# EAGLE board pcb v46 (EAGLE 9.7.0)
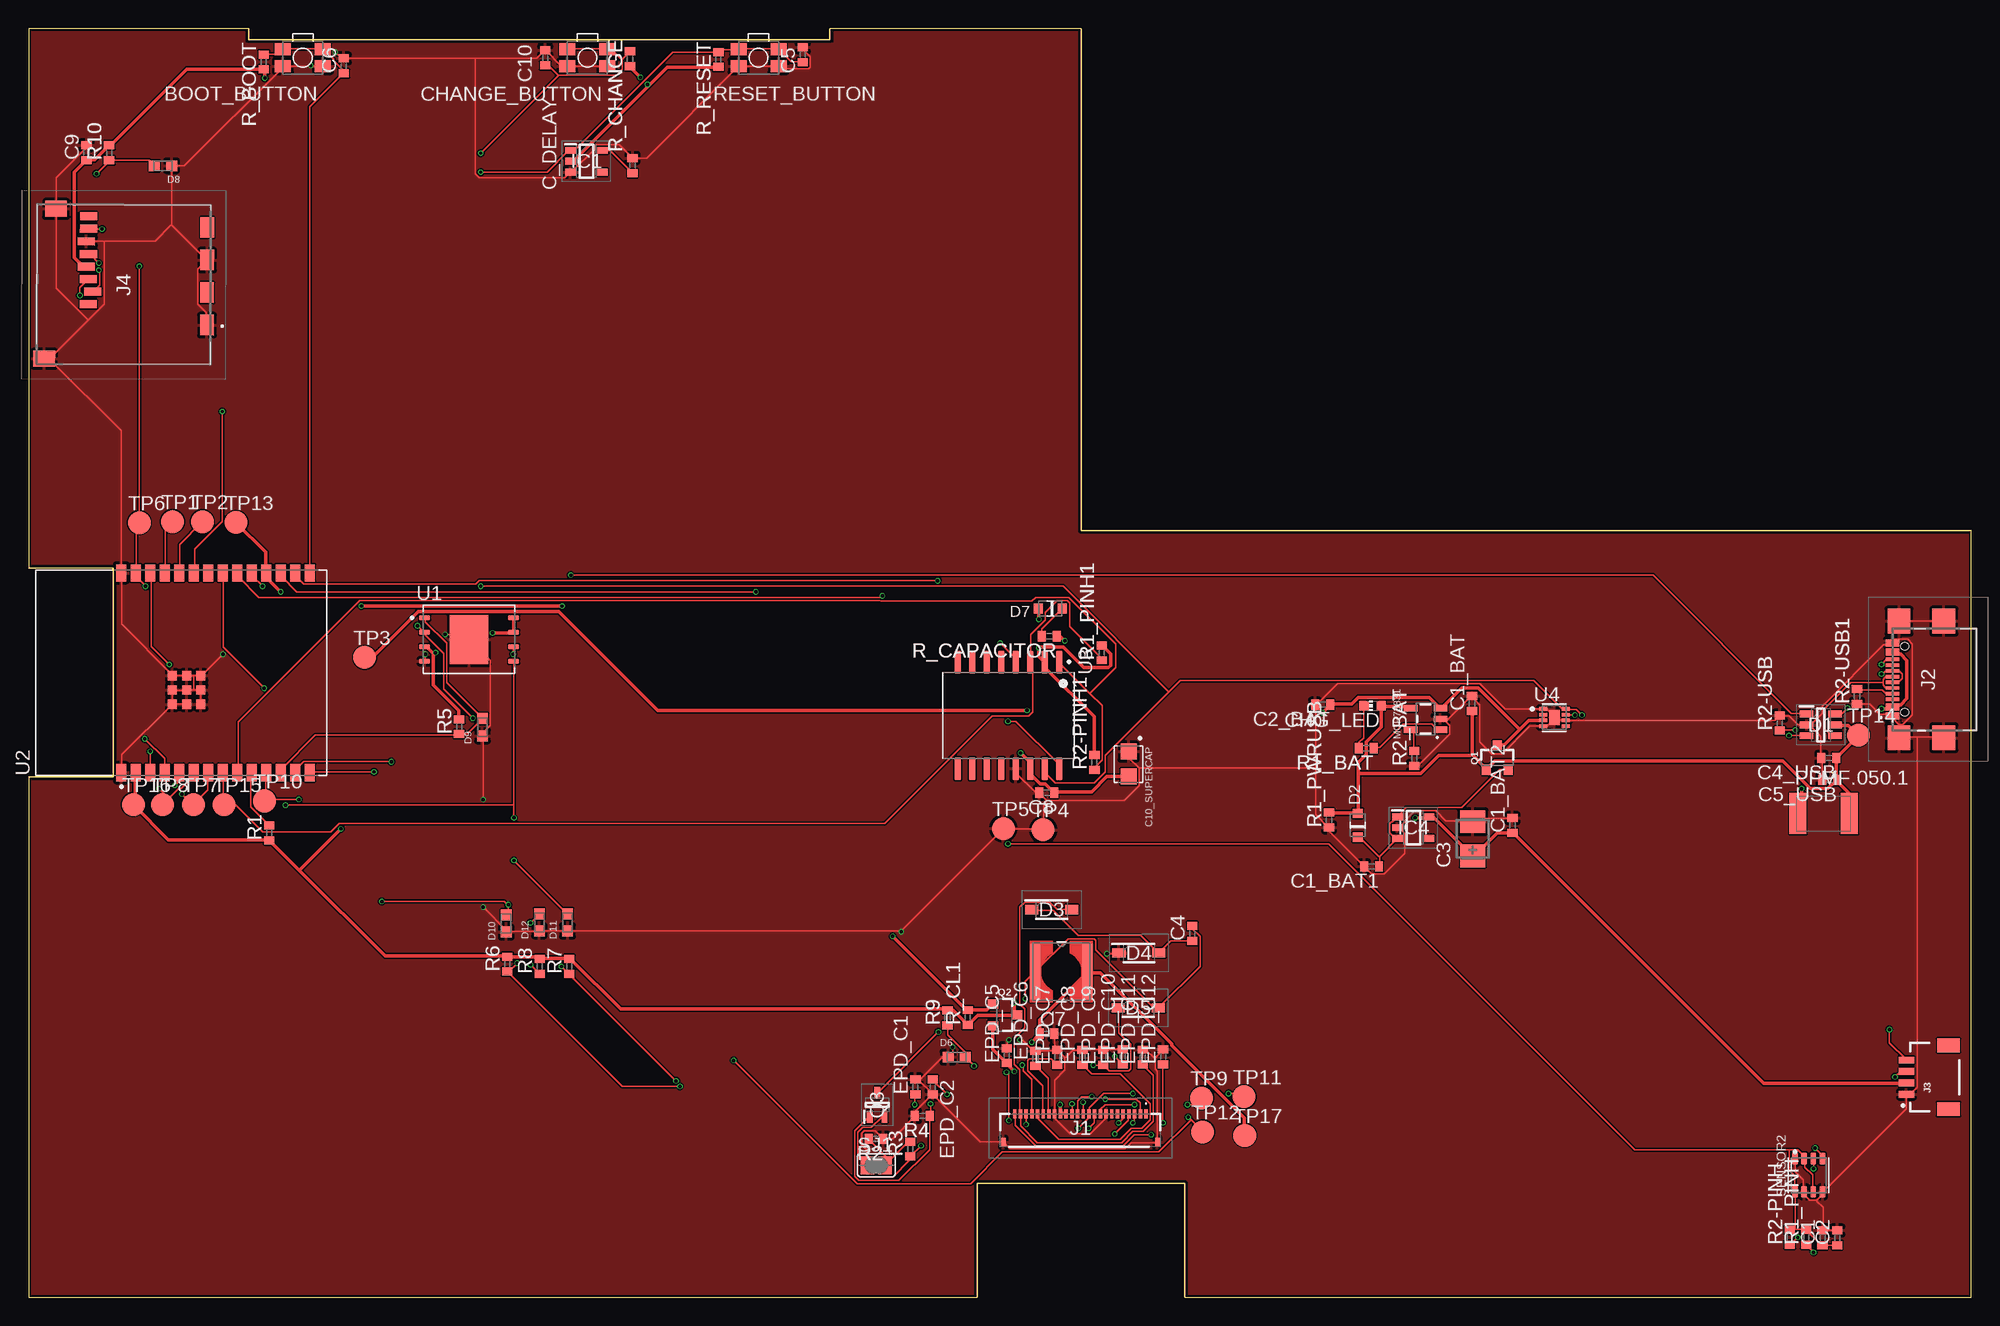
[diagram p0: board, top side]
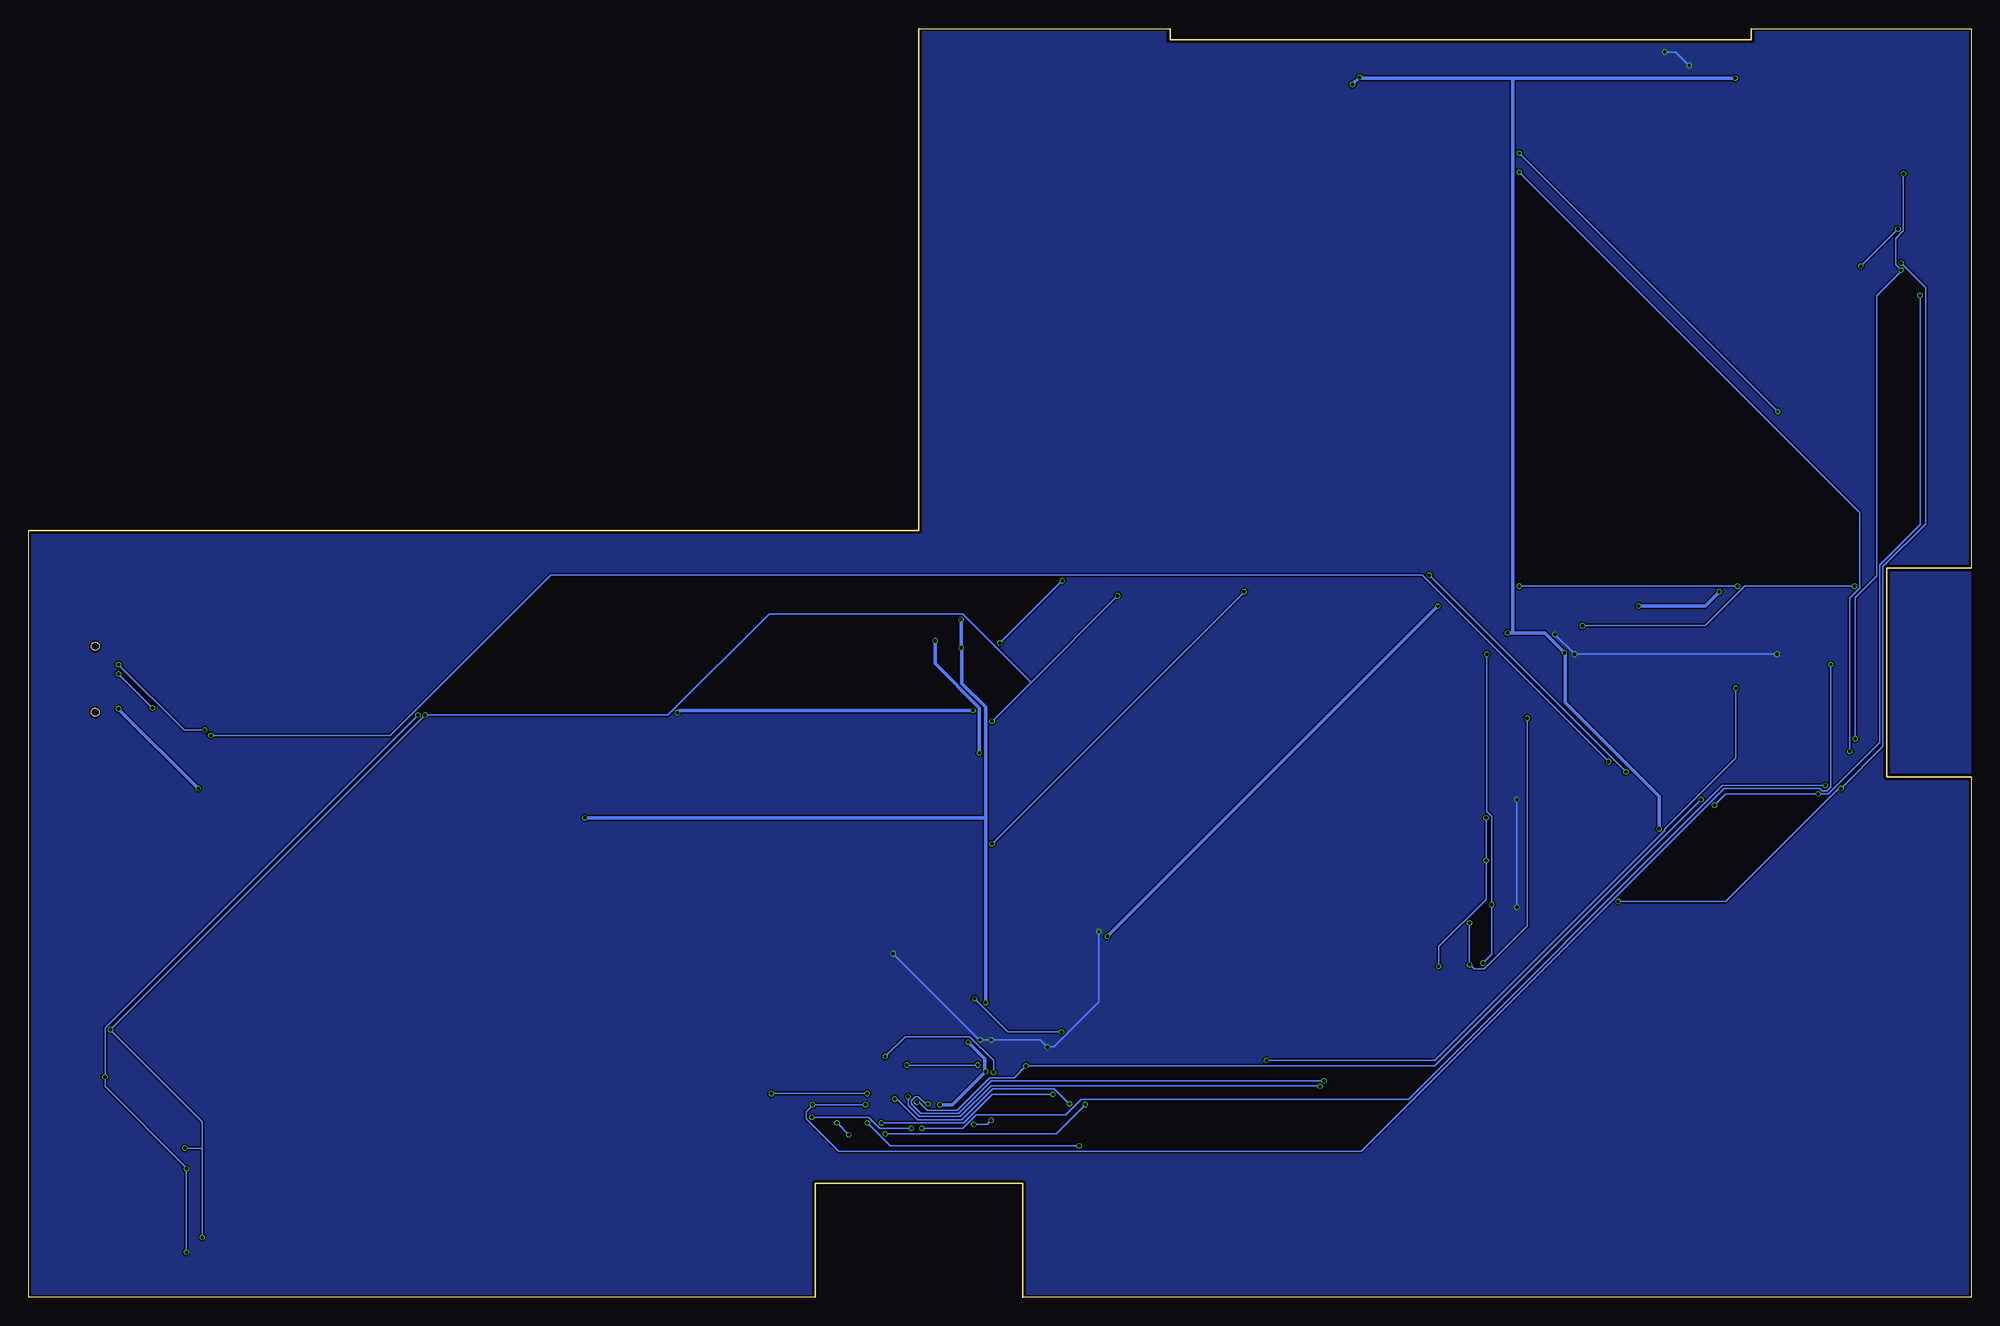
[diagram p1: board, bottom side, seen from below]

Size 170.2 x 111.2 mm. Coordinates in mm from the lower left corner, seen from the top.
Outline: 0,0 83.1,0 83.1,10 101.3,10 101.3,0 170.2,0 170.2,67.2 92.2,67.2 92.2,111.2 70.2,111.2 70.2,110.2 19.3,110.2 19.3,111.2 0,111.2 0,63.9 7.4,63.9 7.4,45.6 0,45.6 0,0
Copper layers (1*16): Top 0.035mm / dielectric 1.6mm / Bottom 0.035mm
Design rules "jlcpcb-2layers.dru *": minimum track width 5mil, minimum drill 0.3mm, track to track 5mil, track to pad 5mil, pad to pad 5mil, via to via 5mil, smd to smd 5mil, copper to edge 0.2mm, drill to drill 6mil, minimum pad ring 10mil, minimum via ring 3mil, stop-mask expansion 4mil, vias tented up to drill 0mil, thermal gap 10mil
Net classes: 0 default: width 0.15 mm; 1 POWER: width 0.3 mm

## Footprints (pad centres in the part's own frame; a part is rotated, then mirrored left to right if it is on the bottom)
MYBUTTON = smd 1.4 x 1.05: 1 1.75,0.75; 2 -1.75,0.75; 3 -1.75,-0.75; 4 1.75,-0.75
ESP32_WROVER_EAGLE-LTSPICE_C0402 = smd 0.7 x 0.9: 1 -0.65,0; 2 0.65,0
RCL_CT3528 = smd 2 x 2.2: + -1.5,0; - 1.5,0
CAPCP3225X100N = smd 1.4 x 1.4: 1 -1.1,0; 2 1.1,0
ADAFRUIT_CHIP-LED0603 = smd 0.8 x 0.8: A 0,-0.75; C 0,0.75
SOT95P280X145-6N = smd 1.2 x 0.6: 1 -1.25,0.95; 2 -1.25,0; 3 -1.25,-0.95; 4 1.25,-0.95; 5 1.25,0; 6 1.25,0.95
ESP32_WROVER_AVX---SD0805S020S1R0_AVX_SD0805S020S1R0_0 = smd 0.8 x 0.9: 1 -1.05,0; 2 1.05,0
SOD3716X135N = smd 1.15 x 0.8: 1 -1.75,0; 2 1.75,0
DIOC1608X36N = smd 0.97 x 0.94: 1 -0.75,0; 2 0.75,0
SOT95P280X125-5N = smd 0.9 x 0.6: 1 -1.4,0.95; 2 -1.4,0; 3 -1.4,-0.95; 4 1.4,-0.95; 5 1.4,0.95
SOT95P280X120-5N = smd 0.9 x 0.6: 1 -1.4,0.95; 2 -1.4,0; 3 -1.4,-0.95; 4 1.4,-0.95; 5 1.4,0.95
FH34SRJ24S05SH99 = smd 0.3 x 0.8: 1 5.75,1.45; 2 5.25,1.45; 3 4.75,1.45; 4 4.25,1.45; 5 3.75,1.45; 6 3.25,1.45; 7 2.75,1.45; 8 2.25,1.45; 9 1.75,1.45; 10 1.25,1.45; 11 0.75,1.45; 12 0.25,1.45; 13 -0.25,1.45; 14 -0.75,1.45; 15 -1.25,1.45; 16 -1.75,1.45; 17 -2.25,1.45; 18 -2.75,1.45; 19 -3.25,1.45; 20 -3.75,1.45; 21 -4.25,1.45; 22 -4.75,1.45; 23 -5.25,1.45; 24 -5.75,1.45 | smd 0.4 x 0.8: MP1 6.75,-1.05; MP2 -6.75,-1.05
SAMACSYS_PARTS_USB4110GFA = smd 0.3 x 1.15: A1 -3.35,3.678; A4 -2.55,3.678; A5 -1.25,3.678; A6 -0.25,3.678; A7 0.25,3.678; A8 1.25,3.678; A9 2.55,3.678; A12 3.35,3.678; B1 3.05,3.678; B4 2.25,3.678; B5 1.75,3.678; B6 0.75,3.678; B7 -0.75,3.678; B8 -1.75,3.678; B9 -2.25,3.678; B12 -3.05,3.678 | smd 2.18 x 2: MP1 -5.11,-0.827; MP2 5.11,-0.827; MP3 -5.11,3.103; MP4 5.11,3.103 | hole 0.65: -2.89,2.603; 2.89,2.603
JST04_1MM_RA = smd 0.6 x 1.35: 1 -1.5,0; 2 -0.5,0; 3 0.5,0; 4 1.5,0 | smd 1.2 x 2: NC1 2.8,-3.675; NC2 -2.8,-3.675
112ATAARR03ATTEND = smd 1.8 x 1.2: G1 10.6,10.4; G2 4.9,10.4; S1 7.75,10.4; S2 2.05,10.4 | smd 1.4 x 1.9: G3 13.6,-3.85; G4 0.45,-2.85 | smd 0.7 x 1.5: P1 8.8,0; P2 7.7,0.4; P3 6.6,0; P4 5.5,-0.2; P5 4.4,0; P6 3.3,-0.2; P7 2.2,0; P8 1.1,0
IND_4828-WE-TPC_WRE = smd 0.889 x 4.826: 1 -2.286,0; 2 2.286,0
ESP32_WROVER_SPARKFUN-IC-POWER_SOT23-5 = smd 0.55 x 1.2: 1 -0.95,-1.3; 2 0,-1.3; 3 0.95,-1.3; 4 0.95,1.3; 5 -0.95,1.3
ESP32C6_VARISTOR_CT/CN1812 = smd 1.5 x 3.6: 1 -2.25,0; 2 2.25,0
ESP32_WROVER_SPARKFUN-DISCRETESEMI_SOT23-3 = smd 0.8 x 0.9: 1 -0.95,-1; 2 0.95,-1; 3 0,1.1
SOT65P210X110-3N = smd 1.05 x 0.5: 1 -1.05,0.65; 2 -1.05,-0.65; 3 1.05,0
ESP32_WROVER_EAGLE-LTSPICE_R0402 = smd 0.7 x 0.9: 1 -0.65,0; 2 0.65,0
ESP32_WROVER_BME680_PSON80P300X300X100-8N = smd 1.016 x 0.5: 1 1.458,1.2; 2 1.458,0.4; 3 1.458,-0.4; 4 1.458,-1.2; 5 -1.458,-1.22; 6 -1.458,-0.4; 7 -1.458,0.4; 8 -1.458,1.2
SJ = smd 1.168 x 1.6: 1 -0.762,0; 2 0.762,0
TP20R = smd 2 x 2: TP 0,0
SON127P600X800X80-9N = smd 0.94 x 0.44: 1 -3.895,1.905; 2 -3.895,0.635; 3 -3.895,-0.635; 4 -3.895,-1.905; 5 3.895,-1.905; 6 3.895,-0.635; 7 3.895,0.635; 8 3.895,1.905 | smd 3.4 x 4.3: 9 0,0
XCVR_ESP32-C6-WROOM-1-N8 = smd 1.5 x 0.9: 1 -8.75,5.26; 2 -8.75,3.99; 3 -8.75,2.72; 4 -8.75,1.45; 5 -8.75,0.18; 6 -8.75,-1.09; 7 -8.75,-2.36; 8 -8.75,-3.63; 9 -8.75,-4.9; 10 -8.75,-6.17; 11 -8.75,-7.44; 12 -8.75,-8.71; 13 -8.75,-9.98; 14 -8.75,-11.25; 15 8.75,-11.25; 16 8.75,-9.98; 17 8.75,-8.71; 18 8.75,-7.44; 19 8.75,-6.17; 20 8.75,-4.9; 21 8.75,-3.63; 22 8.75,-2.36; 23 8.75,-1.09; 24 8.75,0.18; 25 8.75,1.45; 26 8.75,2.72; 27 8.75,3.99; 28 8.75,5.26 | smd 0.8 x 0.8: 29_1 -2.755,0.79; 29_2 -1.505,0.79; 29_3 -0.255,0.79; 29_4 -2.755,-0.46; 29_5 -1.505,-0.46; 29_6 -0.255,-0.46; 29_7 -2.755,-1.71; 29_8 -1.505,-1.71; 29_9 -0.255,-1.71
SOIC127P1032X265-16N = smd 2.05 x 0.59: 1 -4.655,4.445; 2 -4.655,3.175; 3 -4.655,1.905; 4 -4.655,0.635; 5 -4.655,-0.635; 6 -4.655,-1.905; 7 -4.655,-3.175; 8 -4.655,-4.445; 9 4.655,-4.445; 10 4.655,-3.175; 11 4.655,-1.905; 12 4.655,-0.635; 13 4.655,0.635; 14 4.655,1.905; 15 4.655,3.175; 16 4.655,4.445
SON50P200X200X80-9N = smd 0.76 x 0.3: 1 -0.985,0.75; 2 -0.985,0.25; 3 -0.985,-0.25; 4 -0.985,-0.75; 5 0.985,-0.75; 6 0.985,-0.25; 7 0.985,0.25; 8 0.985,0.75 | smd 0.9 x 1.3: 9 0,0

## Placement (x,y rotation side)
BOOT_BUTTON  BUTTON_CUSYOMV1  [MYBUTTON]  24.03,108.65 180 top
C1  100nF  [ESP32_WROVER_EAGLE-LTSPICE_C0402]  157.16,5.23 90 top
C1_BAT  4.7uF  [ESP32_WROVER_EAGLE-LTSPICE_C0402]  126.45,52.05 90 top
C1_BAT1  4.7uF  [ESP32_WROVER_EAGLE-LTSPICE_C0402]  117.65,37.77 180 top
C1_BAT2  4.7uF  [ESP32_WROVER_EAGLE-LTSPICE_C0402]  129.99,41.37 90 top
C2  100nF  [ESP32_WROVER_EAGLE-LTSPICE_C0402]  158.44,5.23 90 top
C2_BAT  4.7uF  [ESP32_WROVER_EAGLE-LTSPICE_C0402]  113.36,51.95 180 top
C3  100uF TANT  [RCL_CT3528]  126.51,40.2 90 top
C4  4.7uF/25V  [ESP32_WROVER_EAGLE-LTSPICE_C0402]  101.95,31.89 90 top
C4_USB  100nF  [ESP32_WROVER_EAGLE-LTSPICE_C0402]  157.7,47.27 180 top
C5  1uF  [ESP32_WROVER_EAGLE-LTSPICE_C0402]  67.82,108.91 90 top
C5_USB  4.7uF  [ESP32_WROVER_EAGLE-LTSPICE_C0402]  157.78,45.35 180 top
C6  100nF  [ESP32_WROVER_EAGLE-LTSPICE_C0402]  27.62,107.93 90 top
C7  10uF  [ESP32_WROVER_EAGLE-LTSPICE_C0402]  89.22,23.11 0 top
C8  100nF  [ESP32_WROVER_EAGLE-LTSPICE_C0402]  89.2,44.23 180 top
C9  100nF  [ESP32_WROVER_EAGLE-LTSPICE_C0402]  5.08,100.33 90 top
C10  100nF  [ESP32_WROVER_EAGLE-LTSPICE_C0402]  45.26,108.63 90 top
C10_SUPERCAP  CPH3225A  [CAPCP3225X100N]  96.36,46.74 270 top
C_DELAY  100nF  [ESP32_WROVER_EAGLE-LTSPICE_C0402]  52.91,99.19 90 top
CHANGE_BUTTON  BUTTON_CUSYOMV1  [MYBUTTON]  48.96,108.63 180 top
CHG_LED  [ADAFRUIT_CHIP-LED0603]  117.74,51.85 90 top
D1  USBLC6-2SC6Y  [SOT95P280X145-6N]  157,50.17 0 top
D2  ESP32_WROVER_AVX---SD0805S020S1R0_AVX_SD0805S020S1R0_0_0AVX_SD0805S020S1R0_0_0  [ESP32_WROVER_AVX---SD0805S020S1R0_AVX_SD0805S020S1R0_0]  116.44,41.38 90 top
D3  MBR0530  [SOD3716X135N]  89.63,33.98 0 top
D4  MBR0530  [SOD3716X135N]  97.27,30.18 0 top
D5  MBR0530  [SOD3716X135N]  97.21,25.38 0 top
D6  PGB1010603MR  [DIOC1608X36N]  81.3,21.07 0 top
D7  ESP32_WROVER_AVX---SD0805S020S1R0_AVX_SD0805S020S1R0_0_0AVX_SD0805S020S1R0_0_0  [ESP32_WROVER_AVX---SD0805S020S1R0_AVX_SD0805S020S1R0_0]  89.49,60.38 180 top
D8  PGB1010603MR  [DIOC1608X36N]  11.78,99.17 180 top
D9  PGB1010603MR  [DIOC1608X36N]  39.76,49.97 90 top
D10  PGB1010603MR  [DIOC1608X36N]  41.84,32.77 90 top
D11  PGB1010603MR  [DIOC1608X36N]  47.22,32.87 90 top
D12  PGB1010603MR  [DIOC1608X36N]  44.75,32.88 90 top
EPD_C1  1uF/50V  [ESP32_WROVER_EAGLE-LTSPICE_C0402]  77.69,18.45 90 top
EPD_C2  1uF/50V  [ESP32_WROVER_EAGLE-LTSPICE_C0402]  79.2,18.45 270 top
EPD_C5  0.1uF/50V  [ESP32_WROVER_EAGLE-LTSPICE_C0402]  85.69,21.19 90 top
EPD_C6  1uF/50V  [ESP32_WROVER_EAGLE-LTSPICE_C0402]  88.21,20.95 90 top
EPD_C7  1uF/50V  [ESP32_WROVER_EAGLE-LTSPICE_C0402]  90.12,21.05 90 top
EPD_C8  1uF/50  [ESP32_WROVER_EAGLE-LTSPICE_C0402]  92.33,21.05 90 top
EPD_C9  1uF/50V  [ESP32_WROVER_EAGLE-LTSPICE_C0402]  94.14,21.05 90 top
EPD_C10  1uF/50V  [ESP32_WROVER_EAGLE-LTSPICE_C0402]  95.85,21.09 90 top
EPD_C11  1uF/50V  [ESP32_WROVER_EAGLE-LTSPICE_C0402]  97.61,21.07 90 top
EPD_C12  1uF/50V  [ESP32_WROVER_EAGLE-LTSPICE_C0402]  99.39,21.09 90 top
IC1  BD5229G-TR  [SOT95P280X125-5N]  48.87,99.57 0 top
IC4  XC6220A331MR-G  [SOT95P280X120-5N]  121.31,41.17 0 top
J1  FH34SRJ-24S-0.5SH_99_  [FH34SRJ24S05SH99]  92.14,14.64 0 top
J2  SAMACSYS_PARTS_USB4110-GF-A  [SAMACSYS_PARTS_USB4110GFA]  166.96,54.16 90 top
J3  QWIIC_RIGHT_ANGLE  [JST04_1MM_RA]  164.51,19.3 90 top
J4  112A-TAAR-R03_ATTEND  [112ATAARR03ATTEND]  5.27,95.84 269.8 top
L1  68uH  [IND_4828-WE-TPC_WRE]  90.47,28.55 0 top
MCP73831  ESP32_WROVER_SPARKFUN-IC-POWER_MCP73831  [ESP32_WROVER_SPARKFUN-IC-POWER_SOT23-5]  122.38,50.69 90 top
PFMF.050.1  ESP32C6_VARISTORCN1812  [ESP32C6_VARISTOR_CT/CN1812]  157.24,42.4 0 top
Q1  20V/4.2A/52mΩ/1.4W  [ESP32_WROVER_SPARKFUN-DISCRETESEMI_SOT23-3]  128.66,47.26 0 top
Q2  20V/4.2A/52mΩ/1.4W  [ESP32_WROVER_SPARKFUN-DISCRETESEMI_SOT23-3]  85.48,24.76 270 top
Q3  SI1308EDL-T1-GE3  [SOT65P210X110-3N]  74.34,16.88 90 top
R1  10K  [ESP32_WROVER_EAGLE-LTSPICE_R0402]  21.08,40.71 90 top
R1_BAT  200  [ESP32_WROVER_EAGLE-LTSPICE_R0402]  117.18,48.13 180 top
R1_PINH  10K  [ESP32_WROVER_EAGLE-LTSPICE_R0402]  155.73,5.27 90 top
R1_PINH1  10K  [ESP32_WROVER_EAGLE-LTSPICE_R0402]  94.01,56.49 90 top
R1_PWRUSB  100K  [ESP32_WROVER_EAGLE-LTSPICE_R0402]  113.92,41.84 90 top
R2  2.2  [ESP32_WROVER_EAGLE-LTSPICE_R0402]  74.24,13.91 180 top
R2-PINH  10K  [ESP32_WROVER_EAGLE-LTSPICE_R0402]  154.29,5.27 90 top
R2-PINH1  10K  [ESP32_WROVER_EAGLE-LTSPICE_R0402]  93.37,46.89 90 top
R2-USB  5K1  [ESP32_WROVER_EAGLE-LTSPICE_R0402]  153.4,50.33 90 top
R2-USB1  5K1  [ESP32_WROVER_EAGLE-LTSPICE_R0402]  160.17,52.67 90 top
R2_BAT  2K  [ESP32_WROVER_EAGLE-LTSPICE_R0402]  121.39,47.23 90 top
R3  0.47  [ESP32_WROVER_EAGLE-LTSPICE_R0402]  77.24,13.01 90 top
R4  10K  [ESP32_WROVER_EAGLE-LTSPICE_R0402]  78.3,15.91 180 top
R5  10K  [ESP32_WROVER_EAGLE-LTSPICE_R0402]  37.72,50.01 90 top
R6  10K  [ESP32_WROVER_EAGLE-LTSPICE_R0402]  41.94,29.21 90 top
R7  10K  [ESP32_WROVER_EAGLE-LTSPICE_R0402]  47.36,29.01 90 top
R8  10K  [ESP32_WROVER_EAGLE-LTSPICE_R0402]  44.78,29.01 90 top
R9  10K  [ESP32_WROVER_EAGLE-LTSPICE_R0402]  80.5,24.51 90 top
R10  10K  [ESP32_WROVER_EAGLE-LTSPICE_R0402]  7.06,100.31 90 top
R_BOOT  10k  [ESP32_WROVER_EAGLE-LTSPICE_R0402]  20.6,108.27 90 top
R_CAPACITOR  15  [ESP32_WROVER_EAGLE-LTSPICE_R0402]  89.42,57.94 180 top
R_CHANGE  10k  [ESP32_WROVER_EAGLE-LTSPICE_R0402]  52.69,108.54 90 top
R_CL1  10K  [ESP32_WROVER_EAGLE-LTSPICE_R0402]  82.28,24.53 90 top
R_RESET  10K  [ESP32_WROVER_EAGLE-LTSPICE_R0402]  60.43,108.49 90 top
RESET_BUTTON  BUTTON_CUSYOMV1  [MYBUTTON]  63.95,108.65 180 top
SENSOR2  ESP32_WROVER_BME680_BME680  [ESP32_WROVER_BME680_PSON80P300X300X100-8N]  155.94,10.72 90 top
SJ1  [SJ]  74.26,11.59 0 top
TP1  TPTP20R  [TP20R]  12.61,67.99 0 top
TP2  TPTP20R  [TP20R]  15.23,67.99 0 top
TP3  TPTP20R  [TP20R]  29.45,56.09 0 top
TP4  TPTP20R  [TP20R]  88.87,40.99 0 top
TP5  TPTP20R  [TP20R]  85.39,41.09 0 top
TP6  TPTP20R  [TP20R]  9.71,67.89 0 top
TP7  TPTP20R  [TP20R]  14.43,43.19 0 top
TP8  TPTP20R  [TP20R]  11.75,43.19 0 top
TP9  TPTP20R  [TP20R]  102.77,17.49 0 top
TP10  TPTP20R  [TP20R]  20.69,43.51 0 top
TP11  TPTP20R  [TP20R]  106.49,17.59 0 top
TP12  TPTP20R  [TP20R]  102.84,14.51 0 top
TP13  TPTP20R  [TP20R]  18.19,67.91 0 top
TP14  TPTP20R  [TP20R]  160.29,49.29 0 top
TP15  TPTP20R  [TP20R]  17.14,43.19 0 top
TP16  TPTP20R  [TP20R]  9.19,43.19 0 top
TP17  TPTP20R  [TP20R]  106.54,14.19 0 top
U1  W25Q512JVEIQ  [SON127P600X800X80-9N]  38.59,57.66 0 top
U2  ESP32-C6-WROOM-1-N8  [XCVR_ESP32-C6-WROOM-1-N8]  13.39,54.74 90 top
U3  DS3231SN#  [SOIC127P1032X265-16N]  85.85,51 270 top
U4  MAX17048G+T10  [SON50P200X200X80-9N]  133.67,50.82 0 top

## Library data of the parts
BOOT_BUTTON CHANGE_BUTTON CHG_LED PFMF.050.1 RESET_BUTTON SJ1 TP1-TP17 = DeskAssistant v19 v1
C1 C1_BAT C1_BAT1 C1_BAT2 C2 C2_BAT C4 C4_USB C5 C5_USB C6-C10 C_DELAY EPD_C1 EPD_C2 EPD_C5-EPD_C12 = DeskAssistant v19 v1; SPICEMODEL: NONE; SPICEPREFIX: C
C3 = DeskAssistant v19 v1; SPICEPREFIX: C
C10_SUPERCAP = DeskAssistant v19 v1; AVAILABILITY: Not in stock; CHECK_PRICES: https://www.snapeda.com/parts/CPH3225A/Seiko+Instruments/view-part/?ref=eda; DESCRIPTION: 11 mF (EDLC) Supercapacitor 3.3 V 1210 (3225 Metric) - -; MF: Seiko Instruments; MP: CPH3225A; PACKAGE: 1210 Seiko; PRICE: None; PURCHASE-URL: https://www.snapeda.com/api/url_track_click_mouser/?unipart_id=562593&manufacturer=Seiko Instruments&part_name=CPH3225A&search_term=None; SNAPEDA_LINK: https://www.snapeda.com/parts/CPH3225A/Seiko+Instruments/view-part/?ref=snap
D1 = DeskAssistant v19 v1; AVAILABILITY: In Stock; CHECK_PRICES: https://www.snapeda.com/parts/USBLC6-2SC6Y/STMicroelectronics/view-part/?ref=eda; DESCRIPTION: 17V Clamp 5A (8/20µs) Ipp Tvs Diode Surface Mount SOT-23-6; MF: STMicroelectronics; MP: USBLC6-2SC6Y; PACKAGE: SOT-23-6 STMicroelectronics; PRICE: None; SNAPEDA_LINK: https://www.snapeda.com/parts/USBLC6-2SC6Y/STMicroelectronics/view-part/?ref=snap
D2 D7 = DeskAssistant v19 v1; CENTROID_NOT_SPECIFIED: No; DATASHEET: http://datasheets.avx.com/schottky.pdf; DIGIKEY_DESCRIPTION: DIODE SCHOTTKY 20V 1A 0805; DIGIKEY_PART_NUMBER: 478-7800-1-ND; LEAD_FREE: yes; MF: AVX; MOUSER_PART_NUMBER: 581-SD0805S020S1R0; PACKAGE: 0805 (2012 metric); PREFIX: D; ROHS: yes; TEMPERATURE_RANGE_HIGH: +125°C; TEMPERATURE_RANGE_LOW: -55°C
D3-D5 = DeskAssistant v19 v1; AVAILABILITY: In Stock; CHECK_PRICES: https://www.snapeda.com/parts/MBR0530/Onsemi/view-part/?ref=eda; DESCRIPTION: Diode Schottky 30 V 500mA Surface Mount SOD-123; MF: ON Semiconductor; MP: MBR0530; PACKAGE: SOD-123-2 ON Semiconductor; PRICE: None; PURCHASE-URL: https://www.snapeda.com/api/url_track_click_mouser/?unipart_id=179458&manufacturer=ON Semiconductor&part_name=MBR0530&search_term=None; SNAPEDA_LINK: https://www.snapeda.com/parts/MBR0530/Onsemi/view-part/?ref=snap
D6 D8-D12 = DeskAssistant v19 v1; AVAILABILITY: In Stock; CHECK_PRICES: https://www.snapeda.com/parts/PGB1010603MR/Littelfuse/view-part/?ref=eda; DESCRIPTION: 150V (Typ) Clamp - Ipp Tvs Diode Surface Mount 0603 (1608 Metric); MF: Littelfuse Inc.; MP: PGB1010603MR; PACKAGE: 0603 Littelfuse Inc.; PRICE: None; PURCHASE-URL: https://www.snapeda.com/api/url_track_click_mouser/?unipart_id=5659453&manufacturer=Littelfuse Inc.&part_name=PGB1010603MR&search_term=None; SNAPEDA_LINK: https://www.snapeda.com/parts/PGB1010603MR/Littelfuse/view-part/?ref=snap
IC1 = DeskAssistant v19 v1; DESCRIPTION: Voltage Detector with Adjustable Delay Time: CMOS processes are utilized to develop high precision, low current consumption CMOS reset ICs that allow arbitrary setting of the delay time. The extensive lineup includes both Nch Open Drain and CMOS output types in a wide range of detection voltages (from 2.3V to 6.0V, in 0.1V steps), enabling selection of the ideal solution based on customer requirements. In addition, the entire series is of course both lead-free and RoHS-compliant.; HEIGHT: 1.25mm; MANUFACTURER_NAME: ROHM Semiconductor; MANUFACTURER_PART_NUMBER: BD5229G-TR; MOUSER_PART_NUMBER: 755-BD5229G-TR; MOUSER_PRICE-STOCK: https://www.mouser.co.uk/ProductDetail/ROHM-Semiconductor/BD5229G-TR?qs=4kLU8WoGk0vvnhrrYwdszw%3D%3D
IC4 = DeskAssistant v19 v1; DESCRIPTION: LDO Voltage Regulators; HEIGHT: 1.2mm; MANUFACTURER_NAME: Torex; MANUFACTURER_PART_NUMBER: XC6220A331MR-G; MOUSER_PART_NUMBER: 865-XC6220A331MR-G; MOUSER_PRICE-STOCK: https://www.mouser.co.uk/ProductDetail/Torex-Semiconductor/XC6220A331MR-G?qs=AsjdqWjXhJ8ZSWznL1J0gg%3D%3D
J1 = DeskAssistant v19 v1; DESCRIPTION: 24 Position FFC, FPC Connector Contacts, Top and Bottom 0.020" (0.50mm) Surface Mount, Right Angle; HEIGHT: 1.1mm; MANUFACTURER_NAME: Hirose; MANUFACTURER_PART_NUMBER: FH34SRJ-24S-0.5SH(99); MOUSER_PART_NUMBER: 798-FH34SRJ24S05SH99; MOUSER_PRICE-STOCK: https://www.mouser.co.uk/ProductDetail/Hirose-Connector/FH34SRJ-24S-0.5SH99?qs=vcbW%252B4%252BSTIpKBl5ap9J8Fw%3D%3D
J2 = DeskAssistant v19 v1; DESCRIPTION: CONN USB 2.0 TYPE-C R/A SMT; HEIGHT: 3.26mm; MANUFACTURER_NAME: GCT (GLOBAL CONNECTOR TECHNOLOGY); MANUFACTURER_PART_NUMBER: USB4110-GF-A; MOUSER_PART_NUMBER: 640-USB4110-GF-A; MOUSER_PRICE-STOCK: https://www.mouser.co.uk/ProductDetail/GCT/USB4110-GF-A?qs=KUoIvG%2F9IlYiZvIXQjyJeA%3D%3D
J3 = DeskAssistant v19 v1; PROD_ID: CONN-13694
J4 = DeskAssistant v19 v1; DESCRIPTION: Micro SD Card Socket, Push-Push Type, Top Mount, SMT, H=1.83mm, 10u; HEIGHT: 1.9mm; MANUFACTURER_NAME: ATTEND; MANUFACTURER_PART_NUMBER: 112A-TAAR-R03 ATTEND
L1 = DeskAssistant v19 v1; COPYRIGHT: Copyright (C) 2024 Ultra Librarian. All rights reserved.; MANUFACTURER_PART_NUMBER: 744043680; MFR_NAME: Wurth Electronics
MCP73831 = DeskAssistant v19 v1; PROD_ID: IC-09995
Q1 Q2 = DeskAssistant v19 v1; PROD_ID: TRAN-14388
Q3 = DeskAssistant v19 v1; AVAILABILITY: In Stock; CHECK_PRICES: https://www.snapeda.com/parts/SI1308EDL-T1-GE3/Vishay+Siliconix/view-part/?ref=eda; DESCRIPTION: Si1308EDL-T1-GE3 N-channel MOSFET Transistor, 1.5 A, 30 V, 3-Pin SC-70 | Siliconix / Vishay SI1308EDL-T1-GE3; MF: Vishay Siliconix; MP: SI1308EDL-T1-GE3; PACKAGE: SOT-323 Vishay Semiconductor; PRICE: None; PURCHASE-URL: https://www.snapeda.com/api/url_track_click_mouser/?unipart_id=274603&manufacturer=Vishay Siliconix&part_name=SI1308EDL-T1-GE3&search_term=None; SNAPEDA_LINK: https://www.snapeda.com/parts/SI1308EDL-T1-GE3/Vishay+Siliconix/view-part/?ref=snap
R1 R1_BAT R1_PINH R1_PINH1 R1_PWRUSB R2 R2-PINH R2-PINH1 R2-USB R2-USB1 R2_BAT R3-R10 R_BOOT R_CAPACITOR R_CHANGE R_CL1 R_RESET = DeskAssistant v19 v1; SPICEMODEL: NONE; SPICEPREFIX: R
SENSOR2 = DeskAssistant v19 v1; AVAILABILITY: Unavailable; DESCRIPTION: Integrated Environmental Unit; MF: Bosch Sensortec; MP: BME680; PACKAGE: LGA-8 Bosch Tools; PRICE: None
U1 = DeskAssistant v19 v1; AVAILABILITY: In Stock; CHECK_PRICES: https://www.snapeda.com/parts/W25Q512JVEIQ/Winbond+Electronics/view-part/?ref=eda; DESCRIPTION: FLASH - NOR Memory IC 512Mb (64M x 8) SPI - Quad I/O 133 MHz 8-WSON (8x6); MF: Winbond Electronics; MP: W25Q512JVEIQ; PACKAGE: Package; PRICE: None; SNAPEDA_LINK: https://www.snapeda.com/parts/W25Q512JVEIQ/Winbond+Electronics/view-part/?ref=snap
U2 = DeskAssistant v19 v1; AVAILABILITY: In Stock; CHECK_PRICES: https://www.snapeda.com/parts/ESP32-C6-WROOM-1-N8/Espressif+Systems/view-part/?ref=eda; DESCRIPTION: Multiprotocol Modules ESP32-C6 module, Wi-Fi 6 in 2.4 GHz band, Bluetooth 5, Zigbee 3.0 and Thread. ESP34-WROOM Compatible - ENGINEERING SAMPLE; MF: Espressif Systems; MP: ESP32-C6-WROOM-1-N8; PACKAGE: None; PRICE: None; SNAPEDA_LINK: https://www.snapeda.com/parts/ESP32-C6-WROOM-1-N8/Espressif+Systems/view-part/?ref=snap
U3 = DeskAssistant v19 v1; AVAILABILITY: In Stock; CHECK_PRICES: https://www.snapeda.com/parts/DS3231SN%23/Analog+Devices/view-part/?ref=eda; DESCRIPTION: Extremely Accurate I²C-Integrated RTC/TCXO/Crystal; MF: Analog Devices; MP: DS3231SN#; PACKAGE: SOIC-16 Maxim; PRICE: None; PURCHASE-URL: https://www.snapeda.com/api/url_track_click_mouser/?unipart_id=99048&manufacturer=Analog Devices&part_name=DS3231SN#&search_term=None; SNAPEDA_LINK: https://www.snapeda.com/parts/DS3231SN%23/Analog+Devices/view-part/?ref=snap
U4 = DeskAssistant v19 v1; AVAILABILITY: In Stock; CHECK_PRICES: https://www.snapeda.com/parts/MAX17048G+T10/Analog+Devices/view-part/?ref=eda; DESCRIPTION: 3µA 1-Cell/2-Cell Fuel Gauge with ModelGauge; MF: Analog Devices; MP: MAX17048G+T10; PACKAGE: TDFN-8 Maxim; PRICE: None; PURCHASE-URL: https://www.snapeda.com/api/url_track_click_mouser/?unipart_id=329239&manufacturer=Analog Devices&part_name=MAX17048G+T10&search_term=None; SNAPEDA_LINK: https://www.snapeda.com/parts/MAX17048G+T10/Analog+Devices/view-part/?ref=snap

## Nets
3V3 [POWER]: C1_BAT2.1 C3.+ C9.1 D7.2 IC1.2 IC4.5 J3.2 J4.P4 Q2.3 R1.1 R1_PINH1.2 R2-PINH1.2 R5.2 R6.2 R7.2 R8.2 R9.2 R10.2 R_BOOT.1 R_CHANGE.1 R_CL1.1 R_RESET.1 TP16.TP U1.3 U1.7 U1.8 U2.2 U3.2
32KHZ: R2-PINH1.1 U2.9 U3.1
DN: D1.4 J2.A7 J2.B7
DP: D1.6 J2.A6 J2.B6
EPD_3V3 [POWER]: C7.1 EPD_C5.1 J1.15 J1.16 L1.2 Q2.2 TP17.TP
EPD_3V3_C [POWER]: Q2.1 R_CL1.2 TP13.TP U2.18
EPD_BUSY: J1.9 TP9.TP U2.26
EPD_CS: D6.2 J1.12 R9.1 TP10.TP U2.11
EPD_DC: J1.11 TP11.TP U2.5
EPD_RST: J1.10 TP12.TP U2.21
FLASH_CS: D9.2 R5.1 U1.1 U2.12
GDR: J1.2 Q3.1 R4.1
GND: BOOT_BUTTON.1 BOOT_BUTTON.2 C1.2 C1_BAT1.2 C1_BAT2.2 C1_BAT.2 C2.2 C2_BAT.2 C3.- C4_USB.2 C5.2 C5_USB.2 C6.2 C7.2 C8.2 C9.2 C10.2 C10_SUPERCAP.1 C_DELAY.2 CHANGE_BUTTON.1 CHANGE_BUTTON.2 D1.2 D4.1 D6.1 D8.1 D9.1 D10.1 D11.1 D12.1 EPD_C1.2 EPD_C2.2 EPD_C5.2 EPD_C6.2 EPD_C7.2 EPD_C8.2 EPD_C9.2 EPD_C10.2 EPD_C11.2 EPD_C12.2 IC1.3 IC4.2 J1.8 J1.17 J1.MP1 J1.MP2 J2.A1 J2.A12 J2.B1 J2.B12 J2.MP1 J2.MP2 J2.MP3 J2.MP4 J3.1 J4.G1 J4.G2 J4.G3 J4.G4 J4.P6 MCP73831.2 R1_PWRUSB.1 R2-USB1.1 R2-USB.2 R2.1 R2_BAT.1 R4.2 RESET_BUTTON.1 RESET_BUTTON.2 SENSOR2.1 SENSOR2.5 SENSOR2.7 SJ1.1 TP4.TP TP5.TP U1.4 U1.9 U2.1 U2.28 U2.29_1 U2.29_2 U2.29_3 U2.29_4 U2.29_5 U2.29_6 U2.29_7 U2.29_8 U2.29_9 U3.13 U4.1 U4.4 U4.6 U4.9
GPIO8: R1.2 U2.10
I2C_PW: C1.1 C2.1 R1_PINH.2 R2-PINH.2 SENSOR2.2 SENSOR2.6 SENSOR2.8 U2.17
INT_RTC: R1_PINH1.1 TP15.TP U2.8 U3.3
IO/BOOT: BOOT_BUTTON.3 BOOT_BUTTON.4 C6.1 R_BOOT.2 U2.15
IO/CHANGE: C10.1 CHANGE_BUTTON.3 CHANGE_BUTTON.4 R_CHANGE.2 U2.23
MISO: D12.2 J4.P7 R8.1 TP6.TP U1.2 U2.27
MOSI: D11.2 J1.14 J4.P3 R7.1 TP7.TP U1.5 U2.7
N$3: C1_BAT1.1 D2.1 IC4.1 IC4.3 Q1.2
N$4: J2.B5 R2-USB.1
N$5: J2.A5 R2-USB1.2
N$6: MCP73831.1 R1_BAT.1
N$7: C4.1 D3.1 D4.2
N$8: CHG_LED.C R1_BAT.2
N$9: MCP73831.5 R2_BAT.2
N$10: EPD_C1.1 J1.4
N$11: EPD_C2.1 J1.5
N$12: EPD_C6.1 J1.18
N$13: EPD_C7.1 J1.19
N$14: EPD_C8.1 J1.20
N$15: EPD_C10.1 J1.22
N$16: C_DELAY.1 IC1.5
N$17: EPD_C12.1 J1.24
N$18: D7.1 R_CAPACITOR.2
PREVGH: D5.1 EPD_C9.1 J1.21
PREVGL: D3.2 EPD_C11.1 J1.23
RESE: J1.3 Q3.2 R3.1
RESE': R2.2 R3.2 SJ1.2
RESET: C5.1 IC1.1 R_RESET.2 RESET_BUTTON.3 RESET_BUTTON.4 U2.3
RTC_RST: U2.16 U3.4
RX: TP2.TP U2.24
SCK: D10.2 J1.13 J4.P5 R6.1 TP8.TP U1.6 U2.6
SCL: J3.4 R2-PINH.1 SENSOR2.4 U2.20 U3.16 U4.7
SDA: J3.3 R1_PINH.1 SENSOR2.3 U2.19 U3.15 U4.8
SRC: C4.2 D5.2 L1.1 Q3.3
SS_SD: D8.2 J4.P2 R10.1 U2.4
TX: TP1.TP U2.25
USB_D+: D1.1 U2.14
USB_D-: D1.3 U2.13
VBAT [POWER]: C2_BAT.1 MCP73831.3 Q1.3 TP3.TP U4.2 U4.3
VBUS [POWER]: C1_BAT.1 C4_USB.1 C5_USB.1 CHG_LED.A D1.5 D2.2 MCP73831.4 PFMF.050.1.2 Q1.1 R1_PWRUSB.2 TP14.TP
VRTC [POWER]: C8.1 C10_SUPERCAP.2 R_CAPACITOR.1 U3.14
VUSB [POWER]: J2.A4 J2.A9 J2.B4 J2.B9 PFMF.050.1.1

## Tracks (layer width: path | path; a pad name or v marks a point on that pad's centre or on a via)
3V3  (via drill 0.3)
  Top 0.3: 54.33,106.19 55.95,107.82 60.39,107.82 R_RESET.1 | 54.33,106.19 47.71,99.58 47.51,99.58 IC1.2 | v53.6,106.92 52.7,107.82 R_CHANGE.1 | v54.22,106.3 54.33,106.19 | J4.P4 4.99,90.37 4.78,90.37 4.02,91.13 4.02,98.61 4.99,99.58 C9.1 5.12,99.72 5.82,99.72 6.99,100.9 R10.2 7.2,100.97 13.85,107.61 20.57,107.61 R_BOOT.1 20.71,107.55 v20.71,106.85 | J3.2 164.47,18.77 152,18.77 130.12,40.65 C1_BAT2.1 128.67,40.72 126.66,38.71 C3.+ 126.45,38.71 123.06,42.1 122.71,42.1 IC4.5 122.57,42.03 v121.47,42.03 | v88.5,59.42 88.5,60.32 D7.2 | R2-PINH1.2 93.35,47.58 93.35,50.9 89.12,55.12 89.12,55.54 U3.2 88.99,55.68 88.5,56.16 v88.5,56.92 88.64,56.99 90.65,56.99 92.45,55.19 94.6,55.19 94.8,55.4 94.8,56.37 94.04,57.13 R1_PINH1.2 | U1.8 42.52,59.55 42.52,58.31 U1.7 42.38,58.24 v40.65,58.24 | 35.46,56.44 35.46,53.67 37.67,51.45 37.67,50.69 R5.2 | 35.46,56.44 34.9,56.99 34.76,56.99 U1.3 | v35.66,56.51 35.59,56.51 35.46,56.44 | U2.2 9.35,45.98 9.35,43.21 TP16.TP 9.21,43.14 12.26,40.1 21.05,40.1 R1.1 21.19,39.96 23.72,37.43 | 23.72,37.43 31.23,29.92 41.83,29.92 R6.2 41.97,29.85 44.74,29.85 R8.2 44.8,29.71 47.3,29.71 R7.2 47.51,29.64 51.87,25.28 80.4,25.28 R9.2 80.54,25.14 81.02,25.14 R_CL1.1 82.41,23.96 83.17,24.72 86.56,24.72 Q2.3 86.36,24.86 v86.36,25.83 | 23.72,37.43 v27.35,41.06
  Bottom 0.3: v54.22,106.3 v53.6,106.92 53.46,106.85 40.16,106.85 | v20.71,106.85 40.16,106.85 | v88.5,59.42 v88.5,56.92 88.43,56.78 88.43,53.81 86.36,51.73 86.36,42.03 | 40.16,58.24 37.4,58.24 v35.66,56.51 35.59,56.37 35.59,52.15 27.35,43.9 v27.35,41.06 | 40.16,58.24 v40.65,58.24 | v86.36,25.83 86.36,42.03 | 86.36,42.03 v121.47,42.03 | 40.16,58.24 40.16,106.85
32KHZ
  Top 0.15: 92.97,52.94 90.3,55.61 U3.1 | 92.97,52.94 94.04,51.87 94.04,47.09 93.42,46.47 93.42,46.26 R2-PINH1.1 | 92.97,52.94 95.22,55.19 95.22,57.27 91.13,61.35 88.22,61.35 87.88,61.01 74.65,61.01 74.58,61.08 29.02,61.08 18.35,50.41 18.35,46.05 U2.9
DN
  Top 0.15: 162.46,53.88 162.46,54.15 162.67,54.36 163.22,54.36 J2.A7 | 162.46,53.88 162.46,53.67 162.67,53.46 163.22,53.46 J2.B7 | 162.46,53.88 159.62,53.88 157.41,51.66 157.41,49.79 157.96,49.24 158.24,49.24 D1.4
DP  (via drill 0.3)
  Top 0.15: J2.A6 163.29,53.95 163.84,53.95 164.12,54.22 164.12,54.64 163.91,54.85 163.29,54.85 J2.B6 163.22,54.85 162.67,54.85 162.46,54.64 v162.32,54.64 | v159.34,51.66 158.86,51.18 158.31,51.18 D1.6
  Bottom 0.15: v162.32,54.64 v159.34,51.66
EPD_3V3  (via drill 0.3)
  Top 0.3: J1.15 90.86,16.14 90.44,16.14 J1.16 90.37,16.27 v90.37,16.9 | Q2.2 84.48,23.75 84.48,21.74 85.66,20.57 EPD_C5.1 85.73,20.43 v86.36,19.8 | TP17.TP 106.51,14.2 106.51,15.72 100.14,22.09 100.14,22.23 93.9,28.46 92.93,28.46 L1.2 92.8,28.53 88.57,24.31 88.57,23.13 C7.1 88.5,22.99 v87.88,22.37
  Bottom 0.3: v90.37,16.9 89.26,16.9 v86.36,19.8 86.42,19.94 86.42,20.91 v87.88,22.37
EPD_3V3_C  (via drill 0.3)
  Top 0.3: Q2.1 84.42,25.69 83.93,25.21 82.34,25.21 R_CL1.2 82.13,25.21 v75.69,31.65 | TP13.TP 18.21,67.86 20.77,65.3 20.77,63.5 U2.18 20.84,63.36 20.84,63.09 v22.09,61.84 | v29.15,60.59 v46.74,60.59
  Bottom 0.3: v46.74,60.59 v75.69,31.65 | v29.15,60.59 23.34,60.59 v22.09,61.84
EPD_BUSY  (via drill 0.3)
  Top 0.15: v96.88,16.9 94.32,16.9 93.9,16.48 93.9,16.14 J1.9 | v101.52,16.9 102.21,16.9 102.77,17.45 TP9.TP | v12.33,55.47 10.73,57.06 10.73,63.43 U2.26
  Bottom 0.15: v96.88,16.9 v101.52,16.9 101.52,16.83 102.08,16.27 102.08,15.65 99.23,12.81 53.46,12.81 21.68,44.6 13.3,44.6 13.09,44.39 12.67,44.39 12.33,44.74 v12.33,55.47
EPD_CS  (via drill 0.3)
  Top 0.15: U2.11 20.77,45.98 20.77,43.63 20.71,43.56 TP10.TP 20.84,43.63 v23.68,43.63 | v92.38,17.11 92.38,16.14 J1.12 | v82.82,20.29 82.06,21.05 D6.2 81.99,21.12 81.99,21.54 80.54,22.99 80.54,23.82 R9.1
  Bottom 0.15: v92.38,17.11 92.17,17.11 91.48,16.41 88.85,16.41 86.01,19.25 83.86,19.25 v82.82,20.29 47.02,20.29 v23.68,43.63
EPD_DC  (via drill 0.3)
  Top 0.15: v96.74,17.87 94.18,17.87 92.93,16.62 92.93,16.14 J1.11 92.86,16.07 92.86,15.72 v91.96,14.82 | v105.12,17.87 106.23,17.87 106.44,17.66 TP11.TP | v12.81,44.87 13.16,45.22 13.16,45.98 U2.5
  Bottom 0.15: v105.12,17.87 v96.74,17.87 | v12.81,44.87 21.81,44.87 49.31,17.38 77.97,17.38 79.36,16 87.19,16 88.36,14.82 v91.96,14.82
EPD_RST  (via drill 0.3)
  Top 0.15: v92.86,14.82 93.35,15.3 93.35,16.07 J1.10 | 101.83,15.55 102.84,14.54 TP12.TP | 101.83,15.55 v101.59,15.79 | v20.64,53.39 17.04,56.99 17.04,63.43 U2.21 | v61.77,20.77 72.57,9.97 82.55,9.97 85.32,12.74 99.03,12.74 101.83,15.55
  Bottom 0.15: v92.86,14.82 95.63,14.82 96.6,15.79 v101.59,15.79 | v20.64,53.39 20.64,47.3 26.87,41.06 26.87,40.93 47.02,20.77 v61.77,20.77
FLASH_CS
  Top 0.15: U1.1 34.76,59.55 34.76,59.21 36.63,57.34 36.63,53.88 39.75,50.76 D9.2 39.75,50.69 38.43,49.38 37.74,49.38 R5.1 37.67,49.31 25.14,49.31 22.16,46.33 22.16,46.05 U2.12
GDR  (via drill 0.3)
  Top 0.15: v94.32,17.38 97.02,17.38 97.36,17.04 97.36,16.14 J1.2 | v79.01,16.97 79.01,15.93 R4.1 78.94,15.86 78.94,12.95 76.24,10.25 72.71,10.25 72.37,10.6 72.37,14.61 73.54,15.79 73.68,15.79 Q3.1
  Bottom 0.15: v94.32,17.38 94.11,17.38 92.31,15.58 88.43,15.58 85.73,18.28 80.33,18.28 v79.01,16.97
GND  (via drill 0.3)
  Top 0.15: v34.76,56.37 34.76,55.82 U1.4 | v36.49,58.1 38.16,58.1 38.57,57.69 U1.9 38.64,57.62 40.44,55.82 40.44,50.14 39.82,49.51 39.82,49.24 D9.1 39.82,49.17 v39.82,43.63 | U2.29_7 15.1,52.01 15.1,53.18 U2.29_8 15.03,53.25 14.47,53.25 | U2.29_1 12.6,52.01 12.6,53.18 U2.29_2 12.67,53.18 13.78,53.18 U2.29_5 13.92,53.25 14.47,53.25 | U2.29_4 13.78,52.01 12.67,52.01 U2.29_1 | U2.1 8.17,46.05 8.17,47.58 12.53,51.94 U2.29_1 | 14.47,54.5 13.92,54.5 U2.29_6 13.78,54.5 12.6,54.5 U2.29_3 12.6,54.57 8.17,59 8.17,63.43 U2.28 8.1,63.5 8.1,75.97 1.87,82.2 J4.G3 1.39,82.27 1.87,82.27 5.23,85.63 | 14.47,54.5 15.03,54.5 U2.29_9 15.17,54.5 v17.04,56.37 | 14.47,54.5 14.47,53.25 | 39.13,108.58 44.53,108.58 45.22,109.28 C10.2 45.29,109.28 46.67,107.89 47.16,107.89 CHANGE_BUTTON.1 47.23,107.89 50.69,107.89 CHANGE_BUTTON.2 | 39.13,108.58 C6.2 27.56,108.58 27.42,108.58 v26.87,109.14 | C5.2 67.86,109.55 67.86,109.35 68.49,108.72 68.49,107.82 68.35,107.68 65.93,107.68 65.72,107.89 RESET_BUTTON.2 65.65,107.89 62.26,107.89 RESET_BUTTON.1 62.19,107.89 54.15,99.86 52.98,99.86 C_DELAY.2 52.91,99.86 51.73,101.04 49.72,101.04 49.58,100.9 49.58,100.62 47.64,98.68 47.51,98.68 IC1.3 47.44,98.61 46.95,98.13 39.47,98.13 39.13,98.47 39.13,108.58 | C9.2 5.05,100.97 5.05,100.76 2.42,98.13 2.42,95.43 J4.G4 2.42,95.36 2.42,88.43 5.23,85.63 | 24.72,107.89 25.76,107.89 BOOT_BUTTON.2 | 24.72,107.89 22.3,107.89 BOOT_BUTTON.1 22.3,107.82 13.64,99.17 12.6,99.17 D8.1 12.53,93.97 | 12.53,93.97 15.58,90.92 J4.G2 15.58,90.86 14.82,90.09 14.82,87.05 15.58,86.28 15.58,85.25 J4.G1 | 6.65,92.59 11.08,92.59 12.46,93.97 12.53,93.97
  Top 0.15: 6.65,92.59 5.05,92.59 J4.P6 | 5.23,85.63 6.65,87.05 6.65,92.59 | v24.72,107.96 24.72,107.89 | C2.2 158.38,5.89 157.2,5.89 C1.2 157.2,5.96 157.2,7.89 156.64,8.45 156.64,8.52 | 156.64,8.52 156.02,8.52 155.6,8.93 155.6,9.21 SENSOR2.7 155.47,9.28 155.47,10.32 154.77,11.01 154.77,12.12 SENSOR2.1 | 156.64,8.52 157.13,9 157.13,9.21 SENSOR2.5 157.2,9.28 164.47,16.55 164.47,17.8 J3.1 164.54,17.87 164.88,17.87 165.44,18.42 165.44,49.1 | U4.9 133.72,50.76 133.1,50.14 132.75,50.14 U4.4 132.61,50.07 131.51,50.07 129.08,47.64 128.18,47.64 127.14,48.68 127.14,51.94 126.45,52.63 C1_BAT.2 126.38,52.7 124.17,50.48 | U4.9 133.79,50.76 133.93,50.62 134.62,50.62 U4.6 134.69,50.55 152.97,50.55 153.39,50.97 R2-USB.2 153.46,50.97 154.22,50.97 154.98,50.21 155.74,50.21 D1.2 | U4.9 133.72,50.83 133.03,51.52 132.75,51.52 U4.1 132.61,51.59 129.36,51.59 127.14,53.81 114.68,53.81 112.81,51.94 C2_BAT.2 112.74,51.94 112.74,46.4 | 124.17,50.48 124.03,50.62 123.68,50.62 MCP73831.2 124.17,50.48 | 124.17,50.48 124.51,50.14 124.51,49.38 121.74,46.6 121.39,46.6 R2_BAT.1 | C5_USB.2 157.13,47.16 157.06,47.23 C4_USB.2 156.99,47.3 156.99,49.17 156.02,50.14 155.81,50.14 D1.2 | 163.29,57.69 163.29,58.66 163.84,59.21 J2.MP4 163.91,59.28 167.72,59.28 J2.MP2 | 163.29,57.69 163.29,57.55 J2.A12 163.29,57.48 163.29,57.27 J2.B1 163.22,57.2 162.53,57.2 157.13,51.8 157.13,51.18 156.09,50.14 D1.2 | R2-USB1.1 160.18,52.01 161.28,52.01 162.18,51.11 163.22,51.11 J2.B12 163.29,51.04 163.29,50.83 J2.A1 163.29,50.76 163.84,50.21 | 163.84,50.21 163.84,49.1 J2.MP3 163.91,49.1 165.44,49.1
  Top 0.15: 165.44,49.1 167.72,49.1 J2.MP1 | 163.29,57.69 164.61,57.69 165.02,57.27 165.02,51.04 164.19,50.21 163.84,50.21 | EPD_C10.2 94.18,21.74 EPD_C9.2 94.11,21.74 92.38,21.74 EPD_C8.2 92.31,21.68 91.48,21.68 90.86,21.05 90.79,21.05 | 90.79,21.05 90.79,19.94 89.89,19.04 89.89,16.14 J1.17 89.96,16.07 89.96,15.65 91.27,14.34 93,14.34 94.39,15.72 94.39,16.07 J1.8 | 90.79,21.05 90.16,21.68 EPD_C7.2 | EPD_C7.2 90.16,21.61 88.22,21.61 EPD_C6.2 88.16,21.61 88.02,21.61 87.05,22.58 v86.84,22.58 | v85.87,22.58 85.73,22.44 85.73,21.88 EPD_C5.2 | C7.2 89.89,23.06 89.89,21.68 EPD_C7.2 | v94.46,30.12 95.5,30.12 D4.1 | 98.68,20.98 98.68,20.01 98.89,19.8 98.89,13.64 J1.MP1 98.82,13.57 96.6,13.57 96.05,13.02 86.01,13.02 85.45,13.57 J1.MP2 85.39,13.64 83.38,13.64 79.22,17.8 EPD_C2.2 | 98.68,20.98 99.37,21.68 EPD_C12.2 | EPD_C11.2 97.64,21.68 97.92,21.68 98.61,20.98 98.68,20.98 | SJ1.1 73.47,11.63 73.47,12.88 72.99,13.37 72.99,14.4 73.2,14.61 74.17,14.61 74.86,13.92 R2.1 74.93,13.92 75.69,13.92 77.63,15.86 R4.2 77.7,15.93 77.7,16.34 79.15,17.8 EPD_C2.2 | EPD_C2.2 79.15,17.87 77.97,19.04 77.7,19.04 EPD_C1.2 78.05,19.04 80.05,21.05 80.54,21.05 D6.1 80.61,21.12 80.95,21.47 v80.95,21.95 | C1_BAT2.2 129.98,41.97 126.73,41.97 126.52,41.76 C3.- 126.45,41.76 124.17,41.76 123.27,42.66 121.47,42.66 120.56,41.76 120.56,41.69 120.08,41.2 IC4.2 119.94,41.13 120.08,41.13 120.56,40.65 120.56,38.92 118.76,37.12 117.66,37.12 117.03,37.74 C1_BAT1.2 116.96,37.81 113.99,40.79 113.99,41.13 R1_PWRUSB.1 113.85,41.2 112.74,42.31 112.74,46.4 | U3.13 86.49,46.33 86.49,45.98 88.22,44.25 88.5,44.25 C8.2 88.57,44.18 89.19,43.56
  Top 0.15: 97.3,46.4 96.4,47.3 96.4,47.78 C10_SUPERCAP.1 | 97.3,46.4 97.3,44.87 95.98,43.56 89.19,43.56 | 89.19,43.56 89.19,43.49 88.92,43.21 88.92,41 TP4.TP 88.85,41.06 85.45,41.06 TP5.TP 85.39,41.06 76.45,32.13 | 76.45,32.13 47.3,32.13 D11.1 47.16,32.13 44.8,32.13 D12.1 44.74,32.06 41.9,32.06 D10.1 41.9,32.13 v39.82,34.21 | 97.3,46.4 112.74,46.4 | v76.45,32.06 76.45,32.13
  Bottom 0.15: v36.49,58.1 v34.76,56.37 v17.04,56.37 | v26.87,109.14 25.9,109.14 v24.72,107.96 | v94.46,30.12 86.91,22.58 v86.84,22.58 v85.87,22.58 81.58,22.58 v80.95,21.95 80.4,21.95 76.45,25.9 v76.45,32.06 | v39.82,34.21 v39.82,43.63
  pour Top: 0.08,45.58 7.42,45.58 7.42,63.92 0.08,63.92
  pour Bottom: 0.08,45.58 7.42,45.58 7.42,63.92 0.08,63.92
  pour Top: 82.96,10.06 82.98,10.08 101.52,10.08 101.54,10.06 101.56,10.04 101.58,10.02 101.58,0.08 169.92,0.08 169.92,66.92 91.98,66.92 91.96,66.94 91.94,66.96 91.92,66.98 91.92,110.92 70.58,110.92 70.58,109.98 70.56,109.96 70.54,109.94 70.52,109.92 18.98,109.92 18.96,109.94 18.94,109.96 18.92,109.98 18.92,110.92 0.08,110.92 0.08,64.08 7.52,64.08 7.54,64.06 7.56,64.04 7.58,64.02 7.58,45.48 7.56,45.46 7.54,45.44 7.52,45.42 0.08,45.42 0.08,0.08 82.92,0.08 82.92,10.02 82.94,10.04
  pour Top: 82.96,10.06 82.98,10.08 101.52,10.08 101.54,10.06 101.56,10.04 101.58,10.02 101.58,0.08 169.92,0.08 169.92,66.92 91.98,66.92 91.96,66.94 91.94,66.96 91.92,66.98 91.92,110.92 70.58,110.92 70.58,109.98 70.56,109.96 70.54,109.94 70.52,109.92 18.98,109.92 18.96,109.94 18.94,109.96 18.92,109.98 18.92,110.92 0.08,110.92 0.08,64.08 7.52,64.08 7.54,64.06 7.56,64.04 7.58,64.02 7.58,45.48 7.56,45.46 7.54,45.44 7.52,45.42 0.08,45.42 0.08,0.08 82.92,0.08 82.92,10.02 82.94,10.04
  pour Bottom: 82.96,10.06 82.98,10.08 101.52,10.08 101.54,10.06 101.56,10.04 101.58,10.02 101.58,0.08 169.92,0.08 169.92,66.92 91.98,66.92 91.96,66.94 91.94,66.96 91.92,66.98 91.92,110.92 70.58,110.92 70.58,109.98 70.56,109.96 70.54,109.94 70.52,109.92 18.98,109.92 18.96,109.94 18.94,109.96 18.92,109.98 18.92,110.92 0.08,110.92 0.08,64.08 7.52,64.08 7.54,64.06 7.56,64.04 7.58,64.02 7.58,45.48 7.56,45.46 7.54,45.44 7.52,45.42 0.53,45.42 0.08,44.97 0.08,0.08 82.92,0.08 82.92,10.02 82.94,10.04
GPIO8
  Top 0.15: R1.2 21.05,41.41 19.46,43 19.46,45.91 19.53,45.98 U2.10
I2C_PW  (via drill 0.3)
  Top 0.15: C2.1 158.38,4.57 157.2,4.57 C1.1 157.13,4.64 156.99,4.64 155.74,5.89 R1_PINH.2 155.67,5.96 154.77,5.96 | 154.77,5.96 154.36,5.96 R2-PINH.2 | 154.77,5.96 154.77,9.21 SENSOR2.8 154.7,9.28 154.7,10.66 154.22,11.15 154.22,12.95 | SENSOR2.6 156.3,9.28 156.3,10.73 155.6,11.43 155.6,12.12 SENSOR2.2 155.47,12.19 155.47,12.46 154.98,12.95 154.22,12.95 | v63.71,61.84 23.48,61.84 22.16,63.16 22.16,63.43 U2.17 | v85.8,39.75 113.92,39.75 140.72,12.95 154.22,12.95
  Bottom 0.15: v85.8,39.75 v63.71,61.84
INT_RTC
  Top 0.15: U2.8 17.04,45.98 17.04,43.28 17.11,43.21 TP15.TP 17.17,43.14 18.14,43.14 20.5,40.79 26.45,40.79 27.21,41.55 75,41.55 84.42,50.97 87.6,50.97 87.95,51.31 87.95,55.47 87.81,55.61 U3.3 87.81,55.68 87.81,58.1 89.06,59.35 89.06,60.04 90.09,61.08 91,61.08 91.2,60.87 91.2,58.79 93.97,56.02 93.97,55.88 R1_PINH1.1
IO/BOOT
  Top 0.15: R_BOOT.2 20.64,108.93 21.81,108.93 22.23,109.35 BOOT_BUTTON.4 22.3,109.42 25.76,109.42 BOOT_BUTTON.3 25.83,109.42 26.73,108.52 26.73,108.38 27.56,107.55 27.56,107.34 C6.1 27.56,107.27 24.65,104.36 24.65,63.5 U2.15
IO/CHANGE  (via drill 0.3)
  Top 0.15: CHANGE_BUTTON.4 47.23,109.42 50.69,109.42 CHANGE_BUTTON.3 50.76,109.35 51.11,109.35 51.94,108.52 52.01,108.52 | 46.4,107.13 45.57,107.96 45.29,107.96 C10.1 | 46.4,107.13 51.52,107.13 52.01,107.61 52.01,108.52 | 52.01,108.52 52.63,109.14 R_CHANGE.2 | v16.97,77.63 16.97,68 14.54,65.58 14.54,63.5 U2.23 | v39.61,100.27 46.4,107.06 46.4,107.13
  Bottom 0.15: v39.61,100.27 v16.97,77.63
MISO  (via drill 0.3)
  Top 0.15: v6.44,93.63 5.26,93.63 J4.P7 | v9.7,90.37 9.7,67.93 TP6.TP 9.7,67.86 9.42,67.59 9.42,63.5 U2.27 9.42,63.43 9.42,63.16 v10.25,62.33 | v43.97,29.15 44.74,28.39 R8.1 | v43.97,32.83 44.74,33.59 D12.2 | v38.92,50.76 36.36,53.32 36.36,56.44 34.76,58.03 34.76,58.24 U1.2 34.62,58.31 v34.07,58.86
  Bottom 0.15: v9.7,90.37 v6.44,93.63 | v43.97,32.83 v43.97,29.15 43.9,29.15 43.56,28.81 42.66,28.81 38.92,32.55 v38.92,50.76 | v10.25,62.33 19.88,62.33 23.34,58.86 v34.07,58.86
MOSI  (via drill 0.3)
  Top 0.15: U2.7 15.72,45.98 15.72,44.46 14.47,43.21 TP7.TP 14.4,43.14 v13.43,44.11 | v4.5,87.81 4.5,88.5 5.19,89.19 J4.P3 | v42.52,42.03 42.52,43.14 | 42.52,43.14 42.52,55.75 U1.5 | v42.52,38.3 47.16,33.66 D11.2 | v91.41,16.97 91.41,16.14 J1.14 | v56.72,18.97 47.37,28.32 R7.1 47.3,28.39 v46.67,29.02 | 42.52,43.14 v22.51,43.14
  Bottom 0.15: v4.5,87.81 4.5,67.73 8.03,64.19 8.03,48.61 12.53,44.11 v13.43,44.11 21.54,44.11 v22.51,43.14 | v42.52,42.03 v42.52,38.3 42.52,34.9 46.67,30.75 v46.67,29.02 | v91.41,16.97 91.62,16.97 92.24,17.59 92.52,17.59 92.86,17.24 92.86,16.97 92.03,16.14 88.71,16.14 85.87,18.97 v56.72,18.97
N$3
  Top 0.15: 118.35,38.64 118.35,37.81 C1_BAT1.1 | 118.35,38.64 119.87,40.16 IC4.3 119.8,40.16 119.25,40.72 119.25,41.55 119.39,41.69 119.46,41.69 119.87,42.1 IC4.1 119.94,42.17 120.7,42.94 125.55,42.94 128.87,46.26 129.57,46.26 Q1.2 | D2.1 116.48,40.3 116.62,40.3 118.28,38.64 118.35,38.64
N$4  (via drill 0.3)
  Top 0.15: v154.77,49.72 153.46,49.72 R2-USB.1 | v162.32,55.47 162.74,55.88 163.22,55.88 J2.B5
  Bottom 0.15: v154.77,49.72 156.57,49.72 v162.32,55.47
N$5
  Top 0.15: R2-USB1.2 160.18,53.25 162.39,53.25 162.67,52.98 163.22,52.98 J2.A5
N$6
  Top 0.15: R1_BAT.1 117.86,48.2 118.35,48.2 120.43,50.28 122.92,50.28 123.4,49.79 123.61,49.79 MCP73831.1
N$7
  Top 0.15: C4.1 101.94,31.23 100.07,31.23 99.03,30.19 D4.2 98.96,30.19 97.44,31.72 91.96,31.72 89.75,33.93 87.95,33.93 D3.1
N$8
  Top 0.15: CHG_LED.C 116.96,51.8 116.96,49.03 116.55,48.61 116.55,48.2 R1_BAT.2
N$9
  Top 0.15: R2_BAT.2 121.33,47.92 121.33,49.51 121.12,49.72 MCP73831.5
N$10  (via drill 0.3)
  Top 0.15: v95.15,14.34 96.33,15.51 96.33,16.07 J1.4 | v77.63,16.9 77.63,17.8 EPD_C1.1
  Bottom 0.15: v95.15,14.34 80.19,14.34 v77.63,16.9
N$11  (via drill 0.3)
  Top 0.15: v95.5,15.3 95.84,15.65 95.84,16.07 J1.5 | v80.47,17.8 79.22,19.04 EPD_C2.1
  Bottom 0.15: v95.5,15.3 88.29,15.3 85.8,17.8 v80.47,17.8
N$12
  Top 0.15: J1.18 89.33,16.14 89.33,19.18 88.22,20.29 EPD_C6.1
N$13
  Top 0.15: J1.19 88.85,16.14 88.85,18.56 87.53,19.88 87.53,20.77 87.67,20.91 89.61,20.91 90.09,20.43 EPD_C7.1
N$14
  Top 0.15: J1.20 88.43,16.07 88.43,15.65 90.23,13.85 95.63,13.85 96.6,14.82 97.5,14.82 98.27,15.58 98.27,16.97 95.63,19.6 93.14,19.6 92.38,20.36 EPD_C8.1
N$15  (via drill 0.3)
  Top 0.15: v87.39,15.17 87.39,16.07 J1.22 | v85.87,15.51 85.87,19.53 v85.66,19.74 | v95.15,21.12 95.84,20.43 EPD_C10.1
  Bottom 0.15: v87.39,15.17 86.22,15.17 v85.87,15.51 | v85.66,19.74 85.66,20.77 87.74,22.85 93.42,22.85 v95.15,21.12
N$16
  Top 0.15: IC1.5 50.28,100.48 50.97,100.48 C_DELAY.1
N$17  (via drill 0.3)
  Top 0.15: v98.33,14.27 96.88,14.27 95.91,13.3 88.22,13.3 86.42,15.1 86.42,16.07 J1.24 | v99.37,15.3 99.37,20.43 EPD_C12.1
  Bottom 0.15: v99.37,15.3 v98.33,14.27
N$18
  Top 0.15: R_CAPACITOR.2 88.78,57.96 88.78,58.59 90.51,60.32 D7.1
PREVGH  (via drill 0.3)
  Top 0.15: v87.05,20.36 87.12,20.29 87.12,19.88 87.88,19.11 87.88,16.14 J1.21 | v93.28,20.36 94.11,20.36 EPD_C9.1 94.18,20.36 94.67,19.88 96.4,19.88 96.53,20.01 96.53,22.16 95.5,23.2 95.5,25.35 D5.1
  Bottom 0.15: v93.28,20.36 v87.05,20.36
PREVGL
  Top 0.15: EPD_C11.1 97.64,20.36 98.54,19.46 98.54,15.44 97.64,14.54 96.74,14.54 95.77,13.57 88.36,13.57 86.91,15.03 86.91,16.07 J1.23 86.84,16.14 86.84,19.94 86.36,20.43 86.36,22.71 87.25,23.61 87.25,25.28 86.84,25.69 86.84,34.21 87.25,34.62 89.47,34.62 90.09,34 91.34,34 D3.2
RESE  (via drill 0.3)
  Top 0.15: v96.74,15.3 96.88,15.44 96.88,16.07 J1.3 | v78.18,13.3 77.28,12.4 R3.1 77.21,12.33 77.21,12.05 75.69,10.53 72.85,10.53 72.64,10.73 72.64,14.47 73.06,14.89 73.82,14.89 74.72,15.79 74.93,15.79 Q3.2
  Bottom 0.15: v96.74,15.3 94.73,13.3 v78.18,13.3
RESE'
  Top 0.15: R3.2 77.21,13.64 77.08,13.64 75.07,11.63 SJ1.2 75.41,12.05 73.61,13.85 R2.2
RESET  (via drill 0.3)
  Top 0.15: C5.1 67.8,108.31 66.83,108.31 65.72,109.42 RESET_BUTTON.3 65.65,109.42 62.26,109.42 RESET_BUTTON.4 62.19,109.35 60.59,109.35 60.45,109.21 R_RESET.2 60.39,109.14 56.44,109.14 47.85,100.55 47.51,100.55 IC1.1 47.44,100.48 47.3,100.48 45.43,98.61 v39.61,98.61 | v10.66,47.85 10.66,46.05 U2.3
  Bottom 0.15: v10.66,47.85 10.66,61.29 9.76,62.19 9.76,68.77 v39.61,98.61
RTC_RST  (via drill 0.3)
  Top 0.15: v79.64,62.81 39.47,62.81 39.2,62.53 24.1,62.53 23.41,63.23 23.41,63.43 U2.16 | v85.11,57.34 86.42,56.02 86.42,55.68 U3.4
  Bottom 0.15: v85.11,57.34 v79.64,62.81
RX
  Top 0.15: U2.24 13.23,63.5 13.23,66 15.17,67.93 TP2.TP
SCK  (via drill 0.3)
  Top 0.15: U2.6 14.47,45.7 13.37,44.6 13.16,44.6 11.77,43.21 TP8.TP 12.26,43.77 v11.43,44.6 | v6.16,90.65 5.4,91.41 5.26,91.41 J4.P5 | v42.45,56.37 42.45,56.99 U1.6 | D10.2 41.9,33.59 42.03,33.73 v42.03,34.42 41.97,34.42 41.69,34.69 v30.95,34.69 | v93.14,17.59 92.24,17.59 91.89,17.24 91.89,16.14 J1.13 | v57.06,18.49 52.01,18.49 41.97,28.53 R6.1 42.03,28.53 v42.8,29.29
  Bottom 0.15: v6.16,90.65 4.02,88.5 4.02,67.8 7.76,64.06 7.76,48.27 v11.43,44.6 11.63,44.6 21.54,34.69 v30.95,34.69 | v42.45,56.37 42.45,42.59 42.03,42.17 v42.03,34.42 42.03,30.05 v42.8,29.29 | v93.14,17.59 93.14,16.83 92.17,15.86 88.57,15.86 85.87,18.56 57.13,18.56 v57.06,18.49
SCL  (via drill 0.3)
  Top 0.15: v135.45,51.04 134.69,51.04 U4.7 | v163.01,23.48 163.01,22.3 164.47,20.84 J3.4 | v154.98,5.26 154.36,4.64 R2-PINH.1 | v156.5,13.09 157.13,12.46 157.13,12.19 SENSOR2.4 | v74.79,61.49 74.65,61.35 20.15,61.35 18.35,63.16 18.35,63.43 U2.20 | v85.8,50.48 86.49,50.48 90.23,46.74 90.23,46.4 U3.16
  Bottom 0.15: 154.98,13.09 154.98,15.37 163.01,23.41 v163.01,23.48 v135.45,51.04 114.19,51.04 105.33,59.9 88.36,59.9 82.37,53.91 | 154.98,13.09 v154.98,5.26 | 154.98,13.09 v156.5,13.09 | v85.8,50.48 82.37,53.91 | 82.37,53.91 v74.79,61.49
SDA  (via drill 0.3)
  Top 0.15: v156.37,3.95 155.74,4.57 R1_PINH.1 | v156.37,11.29 156.37,12.12 SENSOR2.3 | v163.5,19.32 163.91,19.74 164.47,19.74 J3.3 | 99.89,53.08 94.32,47.51 94.32,46.05 93.35,45.08 89.96,45.08 89.06,45.98 89.06,46.33 U3.15 | 99.89,53.08 100.9,54.08 131.85,54.08 134.34,51.59 134.62,51.59 U4.8 134.69,51.52 135.59,51.52 v136.08,51.04 | v20.5,62.33 19.6,63.23 19.6,63.43 U2.19 | v39.61,62.33 90.65,62.33 99.89,53.08
  Bottom 0.15: v156.37,3.95 v156.37,11.29 156.37,11.36 163.5,18.49 v163.5,19.32 163.5,23.61 v136.08,51.04 | v39.61,62.33 v20.5,62.33
SRC  (via drill 0.3)
  Top 0.15: C4.2 102,32.48 102,32.27 102.63,31.65 102.63,29.02 99.03,25.41 D5.2 98.96,25.41 98.54,25.41 93.49,30.47 93.49,31.3 93.35,31.44 91.06,31.44 88.22,28.6 L1.1 88.16,28.53 87.32,27.7 v87.32,26.18 | v79.71,23.27 74.37,17.94 Q3.3
  Bottom 0.15: v79.71,23.27 84.42,23.27 v87.32,26.18
SS_SD  (via drill 0.3)
  Top 0.15: D8.2 11.01,99.23 10.6,99.65 R10.1 7.06,99.58 v5.96,98.47 | v6.16,90.03 6.23,89.96 6.23,88.71 5.68,88.16 J4.P2 | v10.18,48.96 11.91,47.23 11.91,46.05 U2.4
  Bottom 0.15: v5.96,98.47 5.96,93.49 6.65,92.8 6.65,90.51 v6.16,90.03 6.16,89.96 8.31,87.81 8.31,63.23 10.18,61.35 v10.18,48.96
TX
  Top 0.15: U2.25 11.98,63.5 11.98,67.31 12.6,67.93 TP1.TP
USB_D+  (via drill 0.3)
  Top 0.15: v47.51,63.29 142.31,63.29 154.43,51.18 155.74,51.18 D1.1 | v30.26,46.05 24.65,46.05 U2.14
  Bottom 0.15: v30.26,46.05 v47.51,63.29
USB_D-  (via drill 0.3)
  Top 0.15: v154.22,49.24 155.74,49.24 D1.3 | v31.79,46.95 24.1,46.95 23.41,46.26 23.41,46.05 U2.13
  Bottom 0.15: v154.22,49.24 138.5,49.24 124.44,63.29 48.13,63.29 v31.79,46.95
VBAT  (via drill 0.3)
  Top 0.3: U4.2 132.68,51.04 132.68,50.62 U4.3 132.54,50.55 131.44,50.55 130.64,49.76 | 130.64,49.76 129.29,48.41 128.67,48.41 Q1.3 | v87.46,51.45 55.12,51.45 46.47,60.11 34.14,60.11 30.12,56.09 29.5,56.09 TP3.TP | v113.36,51.24 113.99,51.87 C2_BAT.1 114.06,52.01 115.92,52.01 116.48,52.56 122.71,52.56 123.61,51.66 MCP73831.3 123.82,51.66 125.55,53.39 127,53.39 130.64,49.76
  Bottom 0.3: v87.46,51.45 113.15,51.45 v113.36,51.24
VBUS
  Top 0.3: C5_USB.1 158.38,45.36 158.38,47.23 C4_USB.1 158.44,47.37 160.24,49.17 TP14.TP 160.24,49.31 159.41,50.14 158.31,50.14 D1.5 | PFMF.050.1.2 159.48,42.45 159.48,44.18 158.44,45.22 C5_USB.1 | 126.45,47.58 126.45,51.38 C1_BAT.1 | 126.45,47.58 127.7,46.33 Q1.1 127.83,46.4 128.46,47.02 153.67,47.02 156.09,44.6 157.61,44.6 158.17,45.15 158.31,45.15 C5_USB.1 | R1_PWRUSB.2 113.99,42.45 116.41,42.45 D2.2 116.48,42.59 116.48,45.91 | MCP73831.4 121.05,51.66 120.91,51.8 118.56,51.8 CHG_LED.A 118.49,51.66 118.49,50 117.17,48.68 117.17,47.58 116.48,46.88 116.48,45.91 | 116.48,45.91 121.95,45.91 123.54,47.51 126.31,47.51 126.45,47.58
VRTC  (via drill 0.3)
  Top 0.3: v90.79,57.55 90.44,57.89 90.09,57.89 R_CAPACITOR.1 | v86.91,47.71 87.67,46.95 87.67,46.47 U3.14 87.81,46.33 87.81,45.84 88.64,45.01 89.06,45.01 89.82,44.25 C8.1 89.96,44.32 93.14,44.32 94.46,45.64 96.33,45.64 C10_SUPERCAP.2
  Bottom 0.3: v90.79,57.55 90.79,55.54 86.91,51.66 v86.91,47.71
VUSB  (via drill 0.3)
  Top 0.3: J2.A9 163.29,56.65 163.29,56.44 J2.B4 163.43,56.37 163.98,56.37 164.54,55.82 164.54,52.49 163.98,51.94 163.43,51.94 J2.B9 163.29,51.87 163.29,51.66 J2.A4 163.15,51.59 v162.32,51.59 | v155.33,44.6 155.33,42.73 155.05,42.45 PFMF.050.1.1
  Bottom 0.3: v155.33,44.6 v162.32,51.59